# Altium PCB PIN_Gamma_PCB_MAR20.PcbDoc
Units mil, origin at the board's own origin, x right, y up, seen from the top; angles counter-clockwise.
Board outline 2345 x 2350 mil, 4 copper layers (Top, GND, Power, Bottom), stack 30.635 mil thick; 70 components, 44 nets, 201 pads, 0 vias.
Unrouted connection lines stored in the file: 88.
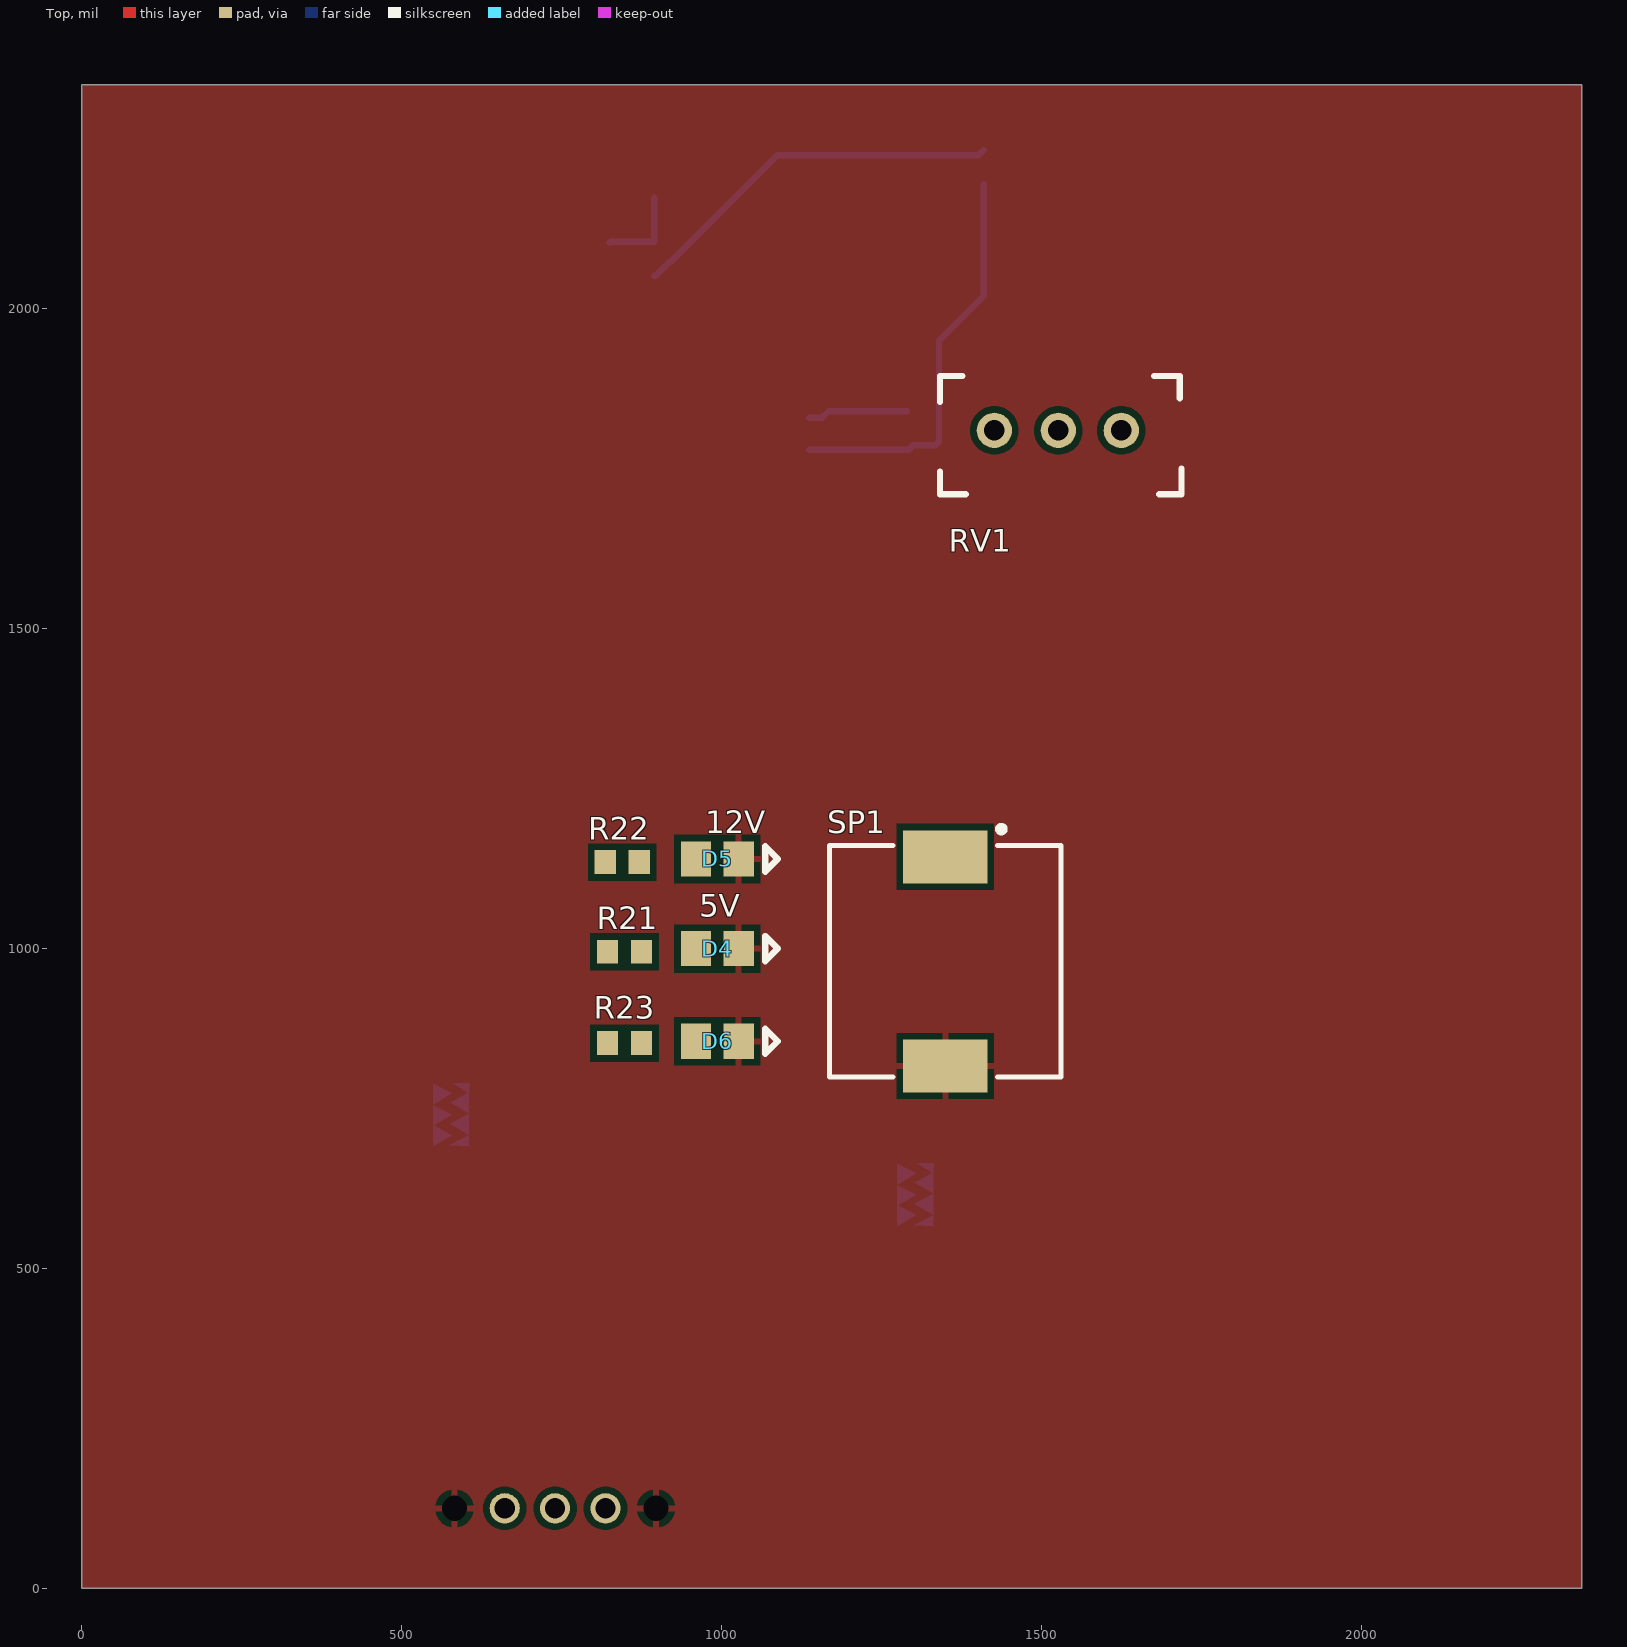
[diagram p0: Top view]
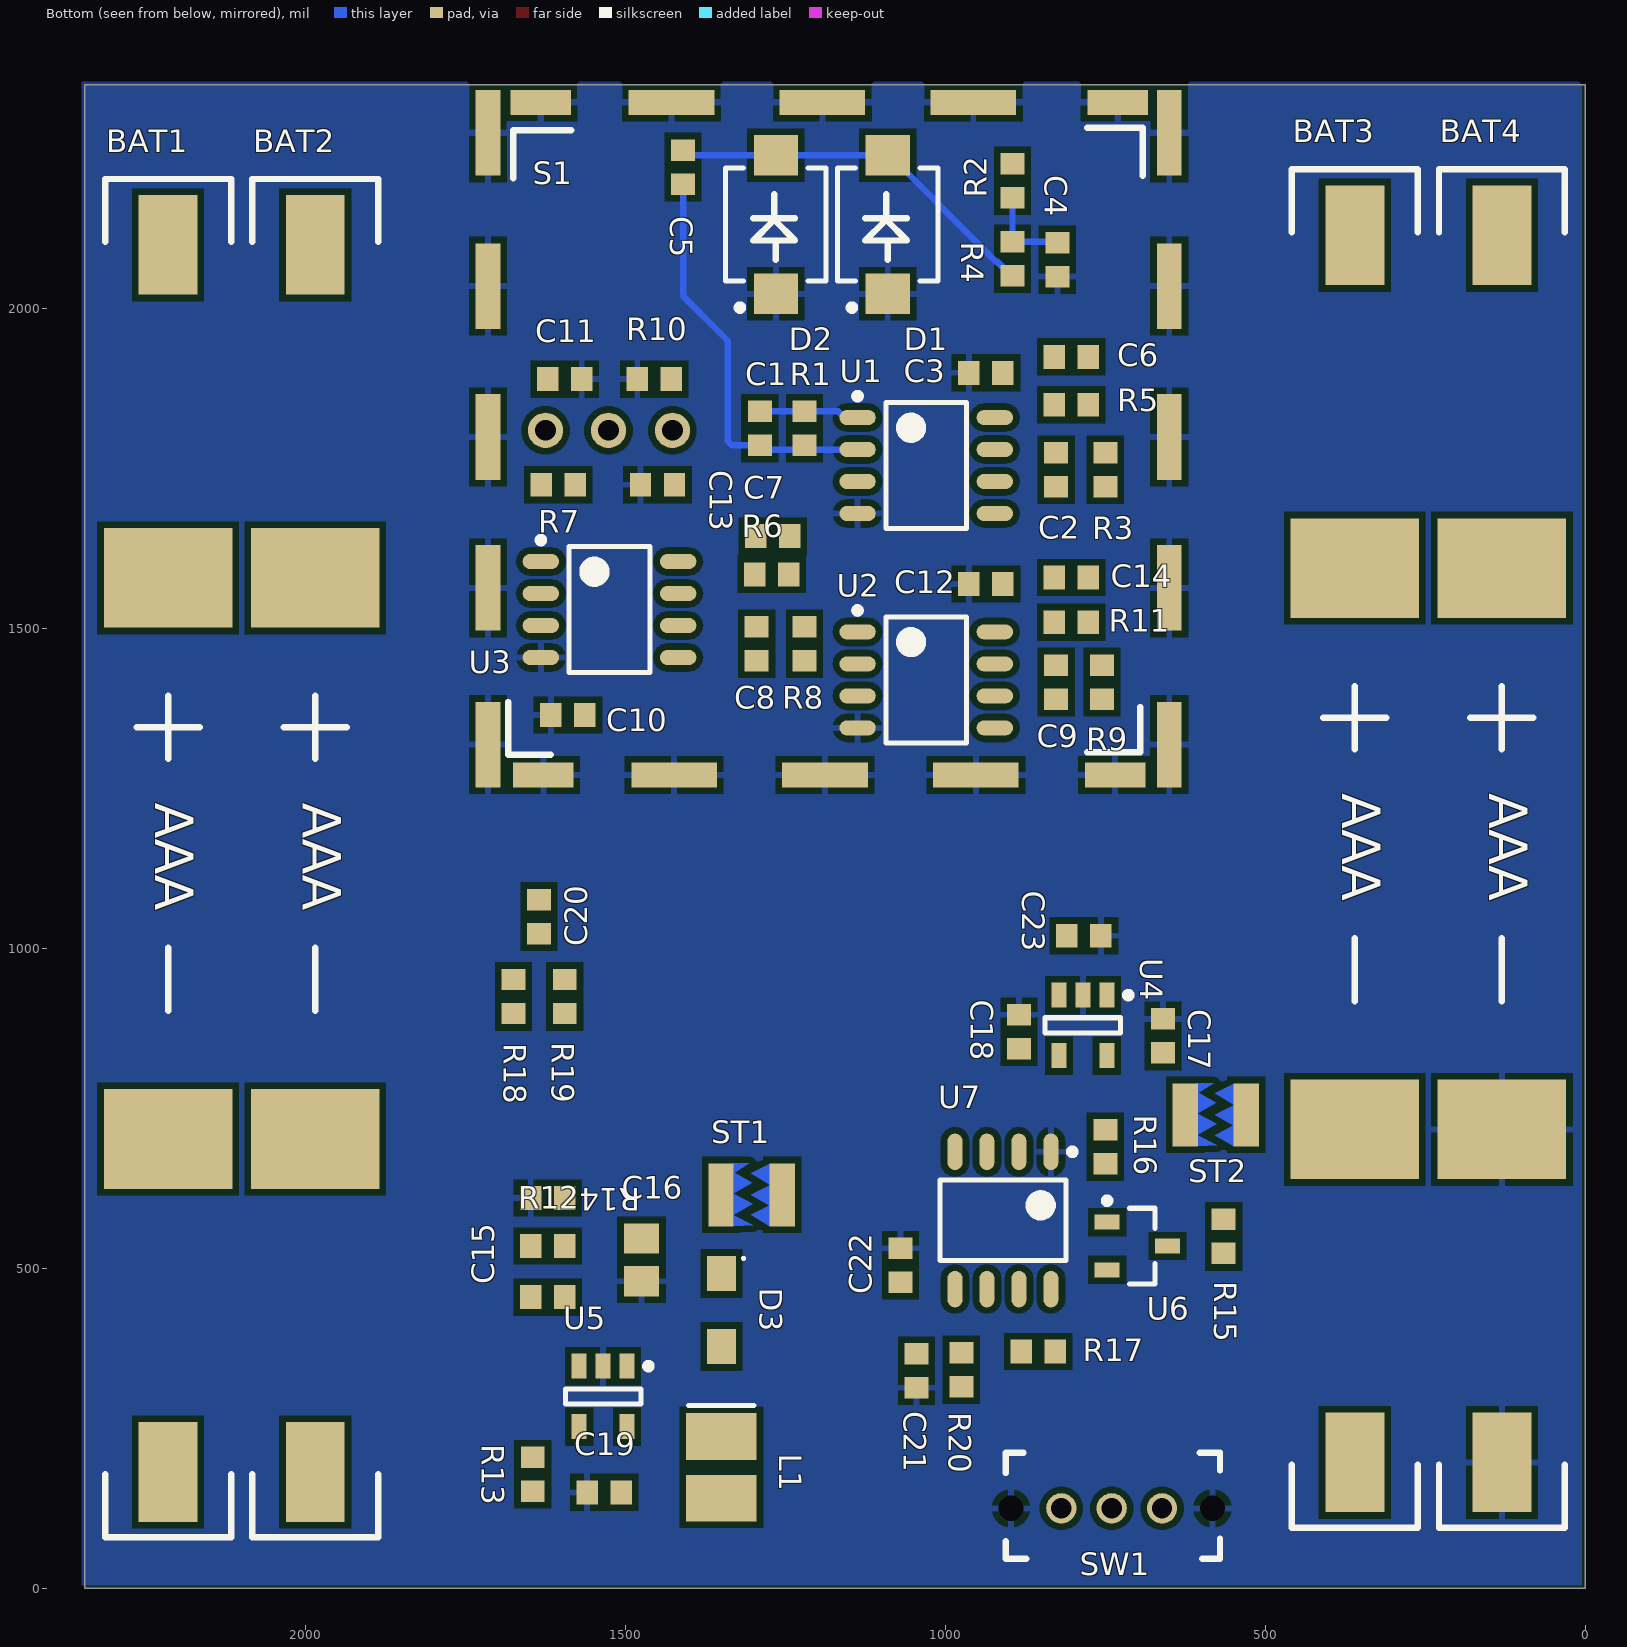
[diagram p1: Bottom view, seen from below]
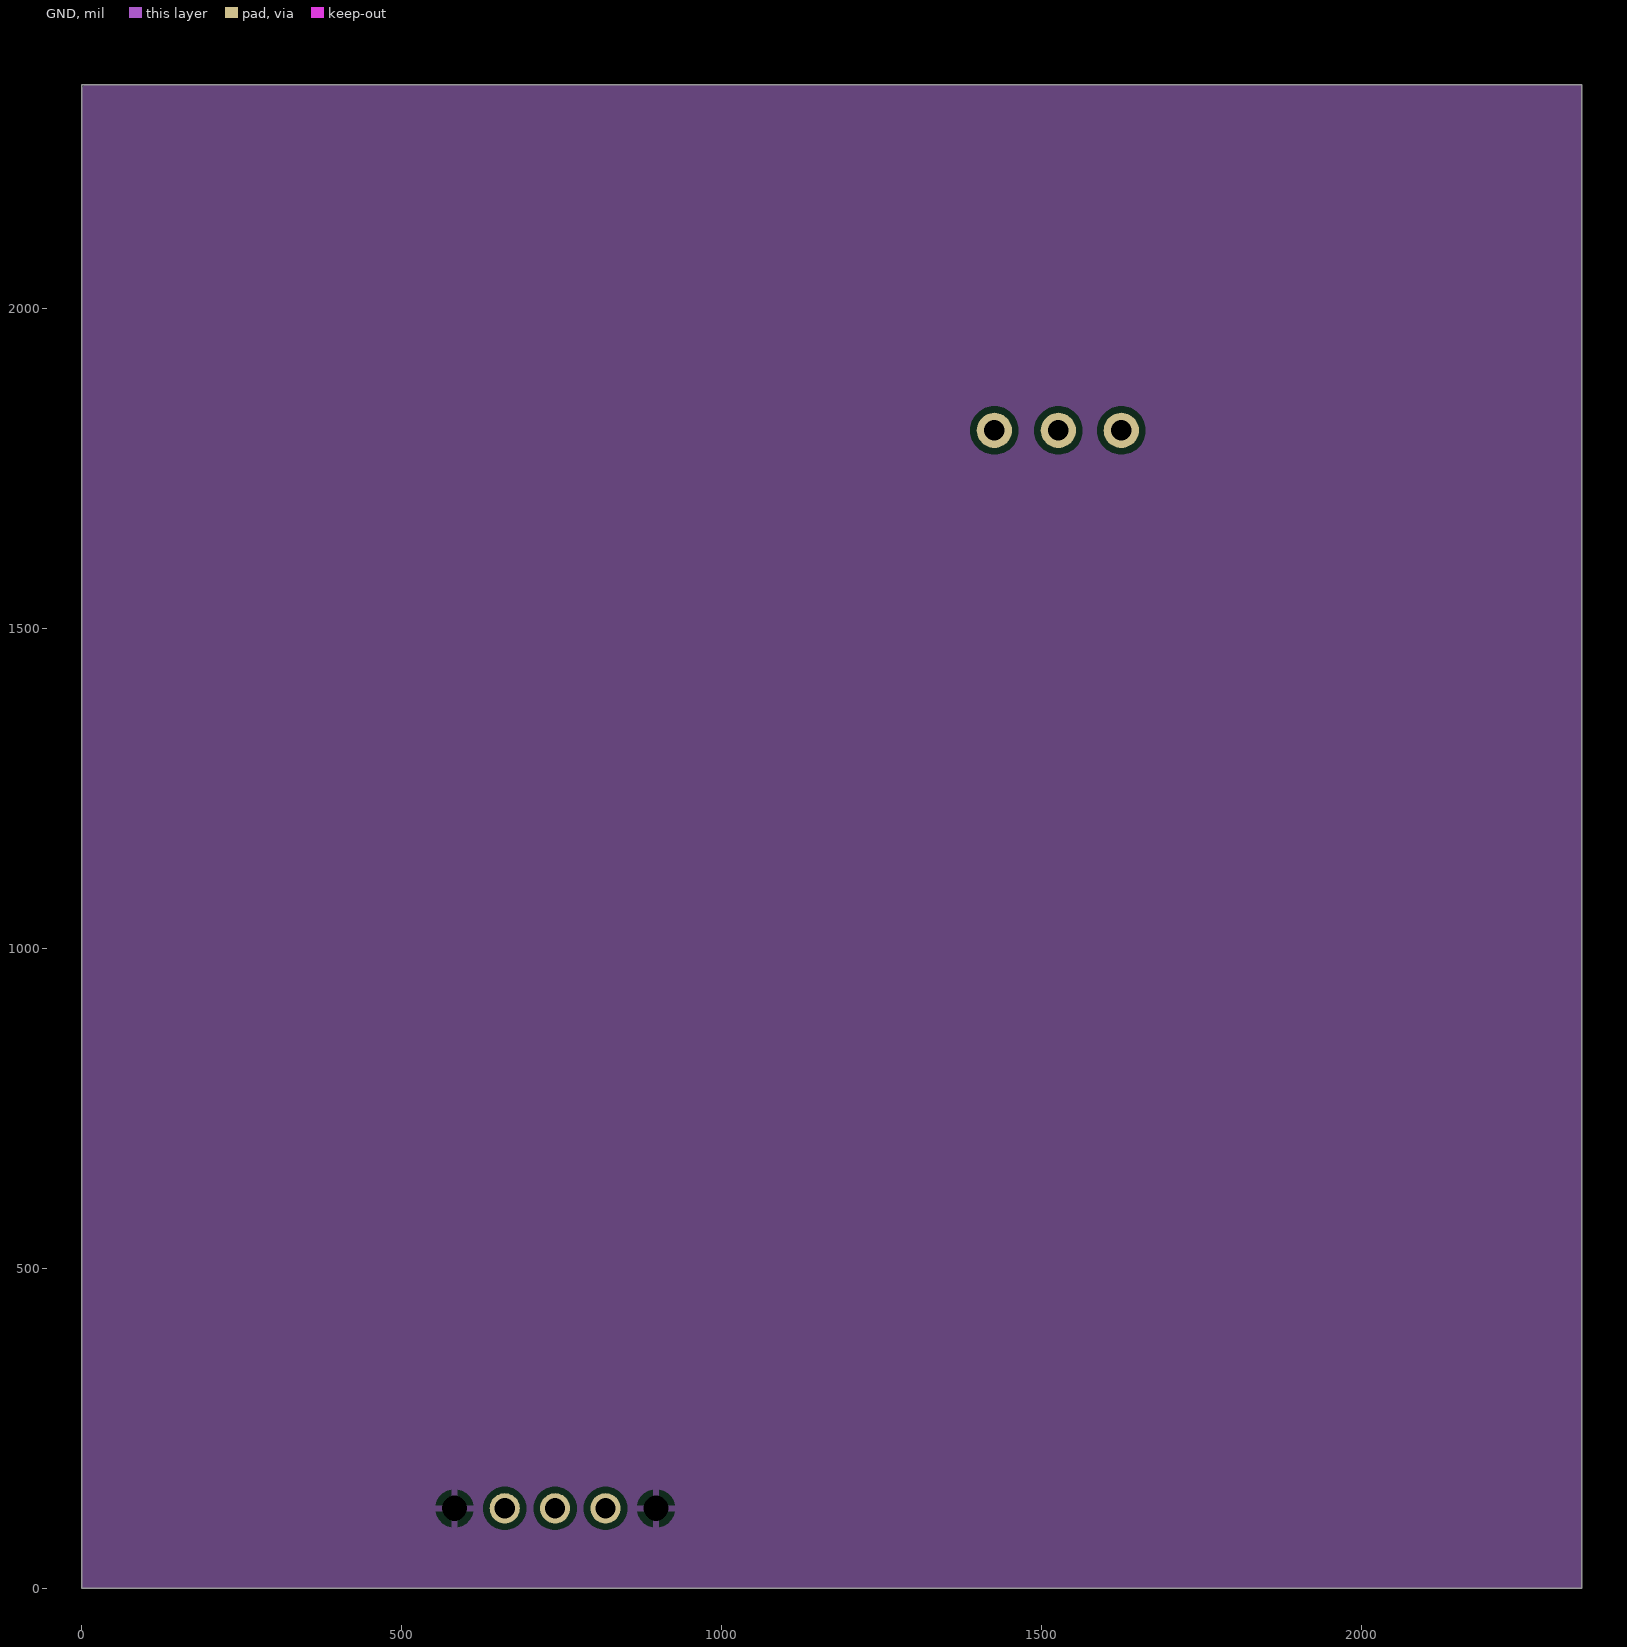
[diagram p2: GND]
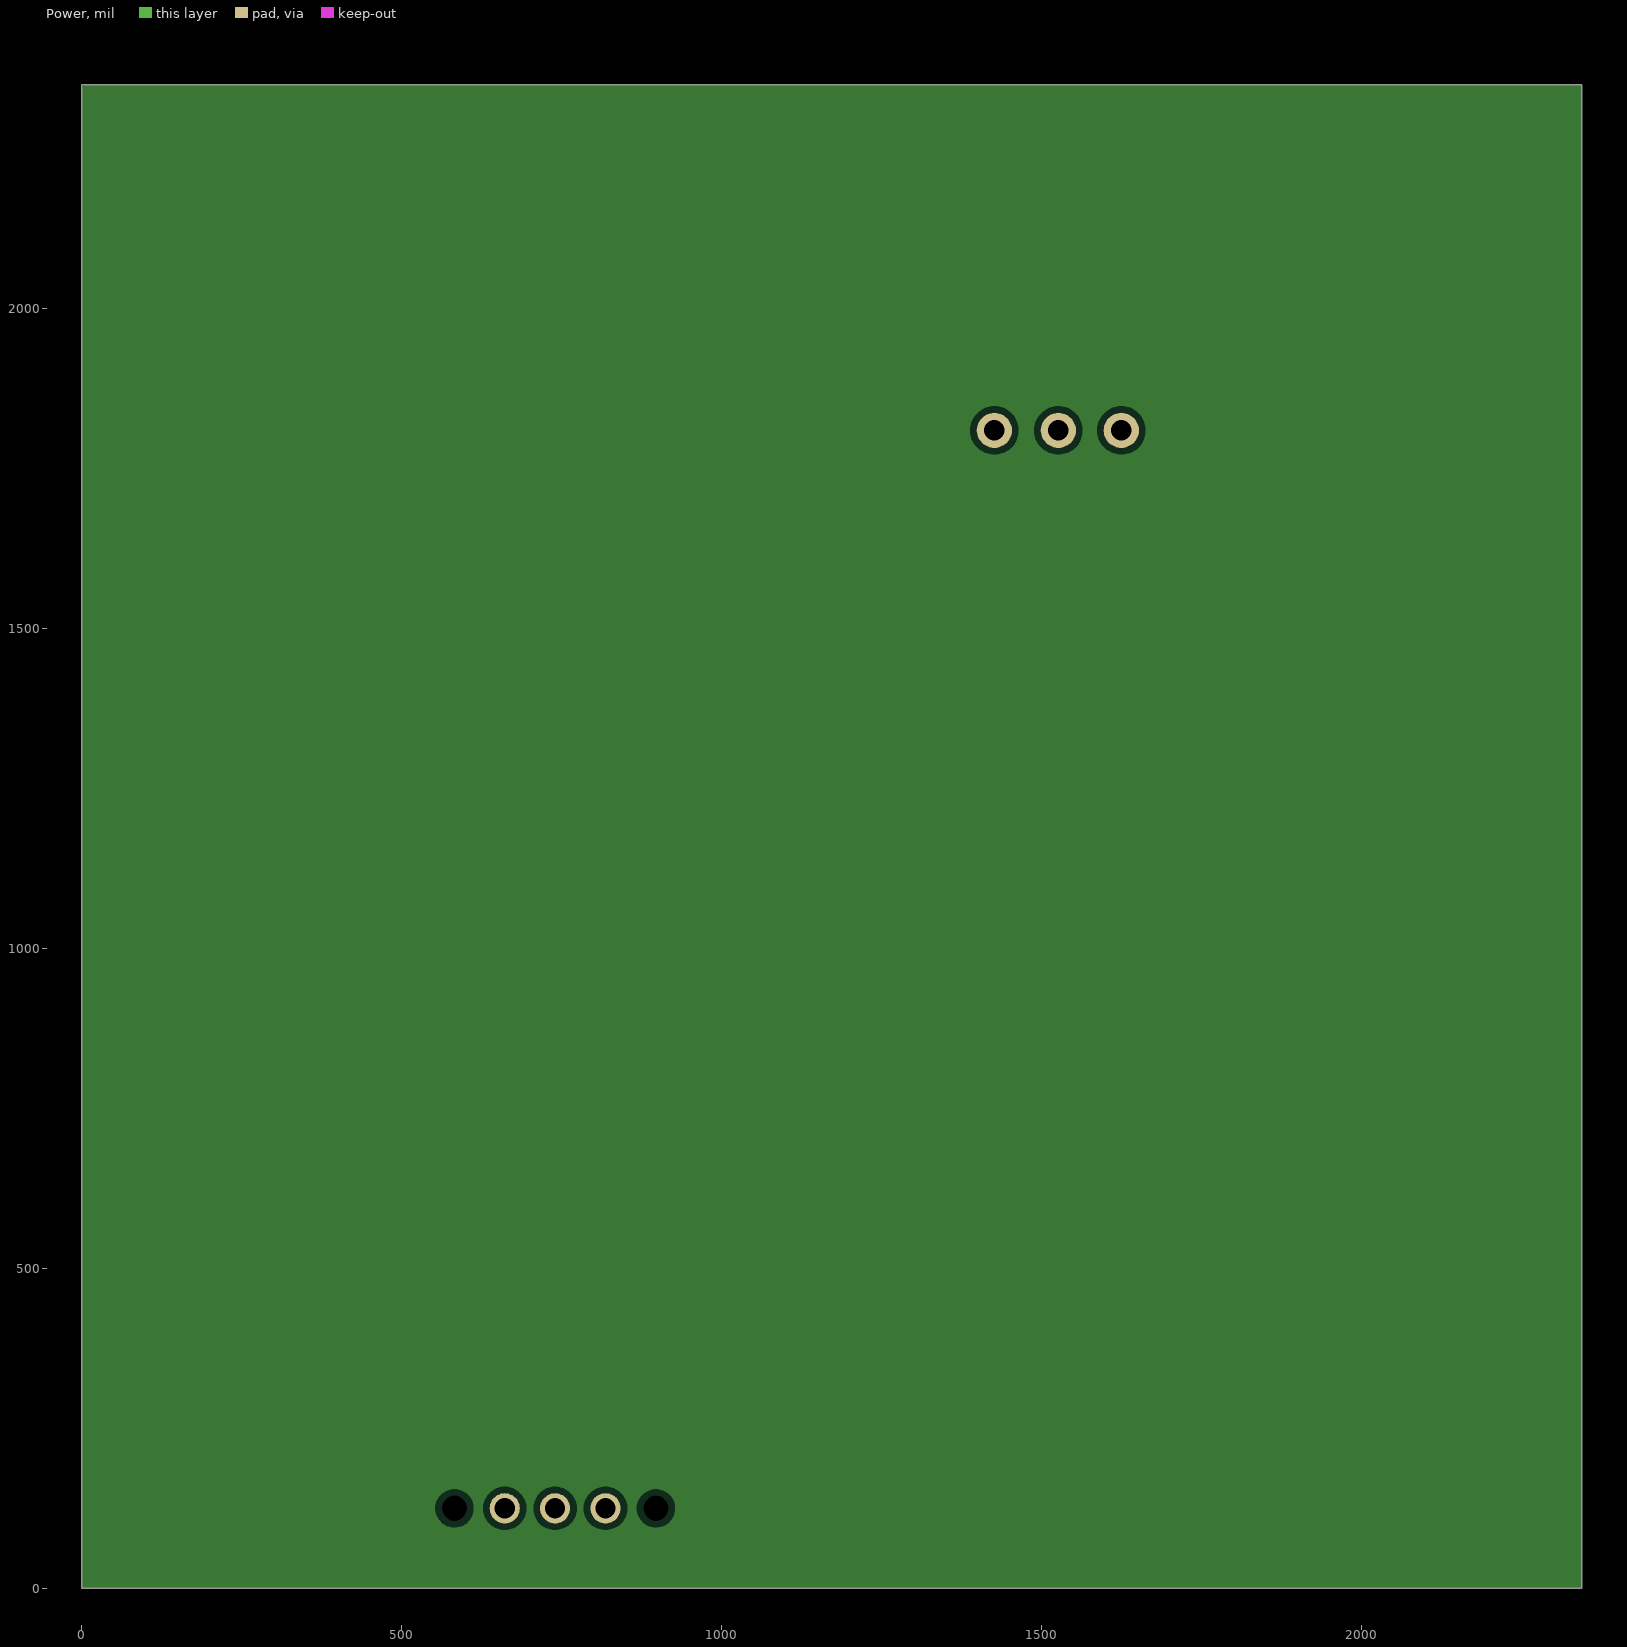
[diagram p3: Power]

## Layer stack, top to bottom
Top Solder: solder mask 0.4, Solder Resist, Dk 3.5
Top: signal copper 1.4
Dielectric 1: core 10, FR-4, Dk 4.2
GND: signal copper 1.4173
Dielectric 3: prepreg 5, Dk 4.2
Power: signal copper 1.4173
Dielectric 2: core 10, Dk 4.2
Bottom: signal copper 1.4
Bottom Solder: solder mask 0.4, Solder Resist, Dk 3.5

## Board outline
0,0 2345,0 2345,2350 0,2350

## Design rules (kind name [scope] priority, off if disabled: settings)
Clearance [All] p1: gap=10 ignorepadtopadclearanceinfootprint=FALSE
PolygonConnect [All] p1: connectstyle=Relief reliefconductorwidth=10 reliefentries=4 polygonreliefangle="90 Angle" airgapwidth=10
RoutingVias [All] p1: holewidth=28 width=50 viastyle="Through Hole" minholewidth=28 minwidth=50 maxholewidth=28 maxwidth=50
SolderMaskExpansion [All] p1: expansion=4 istentingtop=FALSE
Width [All] p1: maxlimit=10 minlimit=10 preferedwidth=10
30 further rules are at their usual default settings.

## Classes and differential pairs
component class PIN_Gamma: C1 C2 C3 C4 C5 C6 C7 C8 C9 C10 C11 C12 C13 C14 D1 D2 R1 R2 R3 R4 R5 R6 R7 R8 R9 R10 R11 RV1 U1 U2 U3
component class PIN_Gamma_Power: BAT1 BAT2 BAT3 BAT4 C15 C16 C17 C18 C19 C20 C21 C22 C23 D3 D4 D5 D6 L1 R12 R13 R14 R15 R16 R17 R18 R19 R20 R21 R22 R23 S1 SP1 ST1 ST2 SW1 U4 U5 U6 U7

## Components (designator, comment, footprint, x,y, rotation, side; value= is the part's Value field where it differs from the comment)
BAT1 "BAT/AAA_Clips/SMT" AAA_BATTERY_SMT 2313.43,56.3 r180 bottom (schematic designator BAT*1)
BAT2 "BAT/AAA_Clips/SMT" AAA_BATTERY_SMT 2083.43,56.3 r180 bottom (schematic designator BAT*2)
BAT3 "BAT/AAA_Clips/SMT" AAA_BATTERY_SMT 458.43,71.3 r180 bottom (schematic designator BAT*3)
BAT4 "BAT/AAA_Clips/SMT" AAA_BATTERY_SMT 228.43,71.3 r180 bottom (schematic designator BAT*4)
C1 "C/4P7/0603" C/0603 1290,1813.43 r90 bottom
C2 "C/4P7/0603" C/0603 826.83,1748.43 r90 bottom
C3 "C/0.1U/0603" C/0603 936.57,1900 r0 bottom
C4 "C/0.1U/0603" C/0603 825,2076.85 r270 bottom
C5 "C/0.01U/0603" C/0603 1410,2221.57 r270 bottom
C6 "C/1000P/0603" C/0603 803.2,1925 r0 bottom
C7 "C/0.01U/0603" C/0603 1270,1645 r180 bottom
C8 "C/4P7/0603" C/0603 1295,1476.57 r90 bottom
C9 "C/4P7/0603" C/0603 826.83,1416.57 r90 bottom
C10 "C/0.1U/0603" C/0603 1590,1365 r0 bottom
C11 "C/0.1U/0603" C/0603 1595,1890 r180 bottom
C12 "C/0.1U/0603" C/0603 936.57,1570 r0 bottom
C13 "C/0.1U/0603" C/0603 1450,1725 r0 bottom
C14 "C/0.01U/0603" C/0603 803.2,1580 r0 bottom
C15 "C/330P/0805" C/0603 1621.57,455 r0 bottom
C16 "C/4U7/0805" R/0805 1475,513.46 r270 bottom locked
C17 "C/1U/0603" C/0603 660,863.43 r90 bottom
C18 "C/1U/0603" C/0603 885,870 r90 bottom
C19 "C/2U2/0603" C/0603 1533.43,150 r0 bottom
C20 "C/100P/0603" C/0603 1635,1050 r90 bottom
C21 "C/0.012U/0603" C/0603 1045,340 r270 bottom
C22 "C/0.1U/0603" C/0603 1070,505 r90 bottom
C23 "C/0.1U/0603" C/0603 783.43,1020 r180 bottom
D1 "D/VBPW34S" VBPW34S 1090,2131.73 r90 bottom locked
D2 "D/VBPW34S" VBPW34S 1265,2131.73 r90 bottom
D3 "D/MBR1020VL" SOD-123F 1350,435 r270 bottom
D4 "D/LEDG/0805" D/0805 993.46,1000 r180 top locked
D5 "D/LEDG/0805" D/0805 993.46,1140 r180 top locked
D6 "D/LEDR/0805" D/0805 993.46,855 r180 top locked
L1 "L/10uH/SMD" INDP3030X15N 1350,189.09 r270 bottom
R1 "R/10M/0603" R/0603 1220,1813.43 r90 bottom
R2 "R/1M/0603" R/0603 895,2200 r270 bottom
R3 "R/10K/0603" R/0603 750,1748.43 r90 bottom
R4 "R/10M/0603" R/0603 895,2078.43 r270 bottom
R5 "R/1K/0603" R/0603 803.2,1850 r180 bottom
R6 "R/1K/0603" R/0603 1271.57,1585 r0 bottom
R7 "R/100K/0603" R/0603 1605,1725 r0 bottom
R8 "R/10K/0603" R/0603 1220,1476.57 r90 bottom
R9 "R/10K/0603" R/0603 755,1416.57 r90 bottom
R10 "R/150K/0603" R/0603 1455,1890 r0 bottom
R11 "R/1K/0603" R/0603 803.2,1510 r180 bottom
R12 "R/118K/0603" R/0603 1621.57,535 r180 bottom
R13 "R/976K/0603" R/0603 1645,178.43 r90 bottom
R14 "R/13K7/0603" R/0603 1621.57,610 r0 bottom
R15 "R/0r/0603" R/0603 565,550 r270 bottom
R16 "R/1K/0603" R/0603 750,690 r270 bottom
R17 "R/10K/0603" R/0603 855,370 r0 bottom
R18 "R/0r/0603" R/0603 1675,925 r90 bottom
R19 "R/0r/0603" R/0603 1595,925 r90 bottom
R20 "R/10K/0603" R/0603 975,341.57 r90 bottom
R21 "R/1K/0603" R/0603 848.43,995 r0 top
R22 "R/287r/0603" R/0603 845,1135 r0 top
R23 "R/287r/0603" R/0603 848.43,852.13 r0 top
RV1 "RV/10K/25Turn" 10K/25TN 1625,1810 r180 top
S1 "RF Shield" "RF SHIELD" 1734.69,2342.13 r180 bottom locked
SP1 "SP/Piezo" "AUDIO PIEZO" 1350,980 r270 top
ST1 "Shark Tooth" SharkTooth 1364.25,563.82 r180 bottom
ST2 "Shark Tooth" SharkTooth 638.78,688.82 r180 bottom
SW1 "SW/SPDT/THT" SW/SPDT/THT 740,125 r0 bottom
U1 "U/MAX4477ASA+-ND" SO8 1030,1755 r180 bottom
U2 "U/MAX4477ASA+-ND" SO8 1030,1420 r180 bottom
U3 "U/MAX987ESA+-ND" SO8 1525,1530 r180 bottom
U4 "U/AP1150ADS50" SOT23-5 785,880 r270 bottom
U5 "LMR62014" SOT23-5 1535,300 r270 bottom
U6 "U/2N3904/SOT23" SOT23-3 700,535 r180 bottom
U7 "U/LM555CMX" SO8 910,575 r270 bottom

## Footprints (in the part's own frame and the unit in brackets; to place one, negate y for a bottom-side part, rotate by r counter-clockwise, add the part's x,y. Pads: shape width x height; smd on the part's side, far side on the other; paste and mask are expansions set on the pad)
10K/25TN [mm]
  round 1.4 hole 0.82: 1(0,0) 2(2.5,0) 3(5.04,0)
  silkscreen extent -2.39,-2.16 7.2,2.54
AAA_BATTERY_SMT [mm] "AAA Battery Holder"
  rect 2.34x3.96 smd: 1(2.5,51.91) 4(2.5,3.19)
  rect 5.1x3.96 smd: 2(2.5,38.69) 3(2.5,16.41)
  silkscreen extent 0,0.6 5,54.52
"AUDIO PIEZO" [mm] "Piezo Speaker 2-Leads, Body 9.00x9.00mm, IPC Medium Density, Digikey 490-9647-1-ND"
  rect 2.1x3.35 smd: 1(-4.15,0) 2(4.15,0)
  silkscreen extent -5.37,-4.6 4.6,4.6, body extent -4.6,-4.5 4.6,4.5, height 2
C/0603 [mm] "Chip Capacitor, 2-Leads, Body 1.60x0.80mm, IPC Medium Density"
  rect 0.85x0.95 smd: 1(-0.675,0) 2(0.675,0)
  body extent -0.85,-0.45 0.85,0.45, height 0.9
D/0805 [mm] "LED, 2-Leads, Body 2.00x1.25mm, IPC Medium Density"
  rect 1.2x1.4 smd: 1(-0.85,0) 2(0.85,0)
  silkscreen extent -2.4,-0.5 -1.9,0.5, body extent -1.05,-0.67 1.05,0.67, height 1.35
INDP3030X15N [mm] "Precision Wire Wound Inductor, 2-Leads, Body 3.00x3.00mm, IPC Medium Density"
  rect 1.85x2.8 smd: 1(-1.225,0) 2(1.225,0)
  silkscreen extent -2.45,-1.3 -2.45,1.3, body extent -1.6,-1.5 1.6,1.5, height 1.6
R/0603 [mm] "Chip Resistor, 2-Leads, Body 1.60x0.80mm, IPC Medium Density"
  rect 0.85x0.95 smd: 1(-0.675,0) 2(0.675,0)
  body extent -0.85,-0.45 0.85,0.45, height 0.9
R/0805 [mm] "Chip Resistor 2-Leads, Body 2.00x1.25mm, IPC Medium Density"
  rect 1.2x1.4 smd: 1(-0.85,0) 2(0.85,0)
  body extent -1.05,-0.67 1.05,0.67, height 1.35
"RF SHIELD" [mm] "1.034X1.034X0.2-NON-VENTED"
  rect 0.99x3.4 smd: 1(0.5,-1.705) 2(0.5,-7.79) 3(0.5,-13.78) 4(0.5,-19.77) 5(0.5,-25.995) 11(27.55,-25.995) 12(27.55,-19.77) 13(27.55,-13.78) 14(27.55,-7.79) 15(27.55,-1.705)
  rect 2.4x0.99 smd: 6(2.7,-27.2) 10(25.4,-27.2) 16(25.5,-0.5) 20(2.6,-0.5)
  rect 3.4x0.99 smd: 7(7.89,-27.2) 8(13.88,-27.2) 9(19.87,-27.2) 17(19.77,-0.5) 18(13.78,-0.5) 19(7.79,-0.5)
  silkscreen extent 1.3,-26.4 26.5,-1.5, body extent -0.13,-27.85 28.2,0.08, height 5.6
SharkTooth [mm] "Sharks Tooth"
  rect 1x2.5 smd: 1(0.35,1.3) 2(2.775,1.3)
  Top region: 1.575,1.775 0.85,2.191 0.85,1.359
  Top region: 1.475,2.55 0.825,2.55 0.85,2.159
  Top region: 1.6,0.95 0.85,1.341 0.85,0.509
  Top region: 1.625,0.1 0.85,0.491 0.85,0.05
  Top region: 1.525,0.5 2.275,0.05 2.275,0.891
  Top region: 1.525,1.3 2.275,0.859 2.275,1.691
  Top region: 1.525,2.15 2.275,1.709 2.275,2.541
  body extent -0.05,-0.05 3.2,2.65, height 0.1
SO8 [mm] "SOIC, 8-Leads, Body 4.90x3.90mm, Pitch 1.27mm, IPC Medium Density"
  oval 1.45x0.6 smd: 1(-2.725,1.905) 2(-2.725,0.635) 3(-2.725,-0.635) 4(-2.725,-1.905) 5(2.725,-1.905) 6(2.725,-0.635) 7(2.725,0.635) 8(2.725,1.905)
  silkscreen extent -2.85,-2.5 1.6,2.88, body extent -3,-2.5 3,2.5, height 1.75
SOD-123F [mm] "SODFL, 2-Leads, Body 1.72x3.60mm, IPC Medium Density"
  rect 1.4x1.15 smd: 1(-1.45,0) 2(1.45,0)
  silkscreen extent -2.1,0.82 -2,0.92, body extent -1.8,-0.97 1.8,0.97, height 1.08
SOT23-3 [mm] "SOT23, 3-Leads, Body 2.90x2.45mm, Pitch 0.95mm, IPC Medium Density"
  rect 1x0.6 smd: 1(-1.2,0.95) 2(-1.2,-0.95) 3(1.2,0)
  silkscreen extent -1.33,-1.5 0.7,1.92, body extent -1.3,-1.5 1.3,1.5, height 1.1
SOT23-5 [mm] "SOT23, 5-Leads, Body 2.90x2.45mm, Pitch 0.95mm, IPC Medium Density"
  rect 1x0.6 smd: 1(-1.2,0.95) 2(-1.2,0) 3(-1.2,-0.95) 4(1.2,-0.95) 5(1.2,0.95)
  silkscreen extent -1.32,-1.5 0.3,1.92, body extent -1.3,-1.5 1.3,1.5, height 1.1
SW/SPDT/THT [mm] "SWITCH SLIDE SPDT 200MA 30V"
  round 0 hole 1 unplated: 1(-4,0) 5(4,0)
  round 1.2 hole 0.8: 2(-2,0) 3(0,0) 4(2,0)
  silkscreen extent -4.3,-2.2 4.2,2
VBPW34S [mm] "SODFL, 2-Leads, Body 3.90x6.40mm, IPC Medium Density"
  rect 1.6x1.75 smd: A(-2.75,0) K(2.75,0)
  silkscreen extent -3.42,-2 2.25,2, body extent -3.2,-2 3.2,2, height 1.2

## Part data
BAT1 BAT2 BAT3 BAT4: "AAA 1.5V SMT Clips", Digikey Part=36-55-ND
C1 C2 C8 C9: "CAP CER 4.7PF 50V C0G/NPO 0603", Digikey=311-1740-1-ND
C3 C4 C10 C11 C12 C13 C22 C23: "CAP CER 0.1UF 50V X7R 0603", Digikey Part=399-7845-1-ND
C5 C7 C14: "CAP CER 0.01UF 50V X7R 0603", Digikey Part=399-1091-1-ND
C6: "CAP CER 1000PF 50V C0G/NP0 0603", Digikey=1276-1091-1-ND
C15: "CAP CER 330PF 50V C0G/NP0 0805", Digikey=1276-2645-1-ND
C16: "CAP CER 4.7UF 50V X5R 0805", Digikey=1276-1860-1-ND
C17 C18: "CAP CER 1UF 50V X5R 0603", Digikey=1276-1860-1-ND
C19: "2.2µF ±10% 10V Ceramic Capacitor X5R 0603 (1608 Metric)", Digikey=490-1545-1-ND
C20: "CAP CER 100PF 50V C0G/NP0 0603", Digikey=399-1061-1-ND
C21: "CAP CER 0.012UF 50V X7R 0603", Digikey Part=1276-1785-1-ND
D1 D2: "PHOTODIODE PIN HI SPEED HI SENS"
D3: "Diode Schottky 20V 1A Surface Mount SOD-123F", Digikey Part=MBR1020VLCT-ND
D4 D5: "LED GREEN CLEAR 2.1V 0805 SMD", Digikey Part=160-1423-1-ND
D6: "LED GREEN CLEAR 2V 0805 SMD", Digikey Part=160-1427-1-ND
L1: "10µH Semi-Shielded Wirewound Inductor 1A 276 mOhm Max Nonstandard", Digikey Part=SRN3015-100MCT-ND
R1 R4: "RES SMD 10M OHM 5% 1/10W 0603", Digikey Part=RMCF0603JT10M0CT-ND
R2: "RES SMD 1M OHM 0.1% 1/16W 0603", Digikey Part=A119955CT-ND
R3 R8 R9 R17 R20: "RES SMD 10K OHM 5% 1/10W 0603", Digikey Part=311-10KGRCT-ND
R5 R6 R11 R16 R21: "RES SMD 1K OHM 5% 1/10W 0603", Digikey Part=311-1.0KGRCT-ND
R7: "RES SMD 100K OHM 1% 1/10W 0603", Digikey Part=311-100KHRCT-ND
R10: "RES SMD 150K OHM 1% 1/10W 0603", Digikey Part=311-150KGRDKR-ND
R12: "RES SMD 118K OHM 1% 1/10W 0603", Digikey Part=311-118KHRCT-ND
R13: "RES SMD 976K OHM 1% 1/10W 0603", Digikey Part=311-976KHRCT-ND
R14: "RES SMD 13.7K OHM 1% 1/10W 0603", Digikey Part=311-13.7KHRCT-ND
R15 R18 R19: "RES SMD 0 OHM JUMPER 1/10W 0603", Digikey Part=311-0.0GRCT-ND
R22 R23: "RES SMD 287 OHM 1% 1/10W 0603", Digikey Part=311-287HRCT-ND
RV1: "TRIMMER 10K OHM 0.5W TH", Digikey Part=A105870-ND
S1: "SMS-403C & SMS-403F RF Shield Cover 1.058\" (26.87mm) X 1.058\" (26.87mm) Non-Vented Surface Mount", Digikey PartC=1798-1210-ND, Digikey PartF=1798-1211-1-ND
SP1: "AUDIO PIEZO TRANSDUCER Max 12.5V 4KHZ SMD", Digikey Part=490-9647-1-ND
ST1 ST2: "Sharks Tooth Small"
SW1: "SWITCH SLIDE SPDT 200MA 30V", Digikey Part=A107673-ND
U1 U2: "Dual Low-Noise, Low-Distortion, Wide-Band, Rail-to-Rail Op Amps"
U3: "Comparator General Purpose CMOS, Push-Pull, Rail-to-Rail, TTL 8-SO"
U4: "IC REG LINEAR 5V 200MA SOT23-5", Digikey Part=AP1150ADS50CT-ND
U5: library part U/LMR62014XMF/NOPBCT-ND, "Boost Switching Regulator IC Positive Adjustable 3V 1 Output 1.8A (Switch) SC-74A, SOT-753"
U6: "TRANS NPN 40V 0.2A SOT23", Digikey Part=MMBT3904LT3GOSCT-ND
U7: "555 Type, Timer/Oscillator (Single) IC 8-SOIC"

## Nets (pads, with @x,y where several pads share a name; then routed paths per layer and width w, separated by ;. In a path a pad name is that pad's centre, name@x,y a point inside that pad or via, vN(x,y) a via of type N, cw(c..) or ccw(c..) an arc to the next point about the centre after c; other vN are vias at no path point)
5V: C3.1 C10.1 C12.1 R7.1 R15.1 R22.1 ST2.2 U1.8 U2.8 U3.7
12V: C17.1 R2.1 R21.1 ST1.2 U4.1 U4.5
CompOut: R16.1 R18.1 R23.1 U3.6
GND: BAT4.3 BAT4.4 C3.2 C4.2 C10.2 C11.2 C12.2 C13.2 C16.2 C17.2 C18.2 C19.2 C21.2 C22.2 C23.2 D1.A D2.A D4.1 D5.1 D6.1 R10.2 R14.2 S1.1 S1.2 S1.3 S1.4 S1.5 S1.6 S1.7 S1.8 S1.9 S1.10 S1.11 S1.12 S1.13 S1.14 S1.15 S1.16 S1.17 S1.18 S1.19 S1.20 SP1.2 SW1.1 SW1.5 U1.4 U2.4 U3.4 U4.2 U5.2 U7.1
IN+: C11.1 R7.2 RV1.1 U1.3 U1.5 U2.3 U2.5
NetBAT1_1: BAT1.1 BAT1.2 SW1.4
NetBAT1_3: BAT1.3 BAT1.4 BAT2.1 BAT2.2
NetBAT2_3: BAT2.3 BAT2.4 BAT3.1 BAT3.2
NetBAT3_3: BAT3.3 BAT3.4 BAT4.1 BAT4.2
NetC1_1: C1.1 C5.2 R1.1 U1.2 | length 639.3
  Bottom w10: U1.2 1293.15,1780 1300,1786.85 1334.14,1786.85 1340,1792.71 1340,1950 1410,2020 C5.2
NetC1_2: C1.2 C6.1 R1.2 U1.1 | length 156.9
  Bottom w10: U1.1 1157.7,1830 1167.7,1840 R1.2 C1.2
NetC2_1: C2.1 R3.1 R5.2 U1.6
NetC2_2: C2.2 C7.1 R3.2 U1.7
NetC4_1: C4.1 R2.2 R4.1 | length 139.1
  Bottom w10: C4.1 826.57,2105 R4.1 R2.2
NetC5_1: C5.1 D1.K D2.K R4.2 | length 596.3
  Bottom w10: R4.2 896.97,2051.85 918.39,2073.27 920.32,2073.27 1087.05,2240 D1.K D2.K 1401.85,2240 C5.1
NetC6_2: C6.2 R5.1
NetC7_2: C7.2 R6.1
NetC8_2: C8.2 C14.1 R8.2 U2.1
NetC9_1: C9.1 R9.1 R11.2 U2.6
NetC9_2: C9.2 R9.2 U2.7 U3.2
NetC13_1: C13.1 R10.1 RV1.3
NetC14_2: C14.2 R11.1
NetC15_1: C15.1 R12.2 R14.1 U5.3
NetC15_2: C15.2 C16.1 D3.1 R12.1 ST1.1
NetC18_1: C18.1 ST2.1 U4.4
NetC20_1: C20.1 R18.2 R19.2
NetC20_2: C20.2 SP1.1
NetC21_1: C21.1 R20.2 U7.2 U7.6
NetC22_1: C22.1 U7.5
NetC23_1: C23.1 U4.3
NetD3_2: D3.2 L1.1 U5.1
NetD4_2: D4.2 R21.2
NetD5_2: D5.2 R22.2
NetD6_2: D6.2 R23.2
NetR13_2: R13.2 U5.4
NetR15_2: R15.2 U6.3
NetR16_2: R16.2 U6.1
NetR17_1: R17.1 U6.2 U7.4 U7.8
NetR17_2: R17.2 R20.1 U7.7
NetR19_1: R19.1 U7.3
NetRV1_2: RV1.2 U3.3
NetSW1_2: SW1.2
OUTB: C8.1 R6.2 R8.1 U2.2
V_Bat: C19.1 L1.2 R13.1 SW1.3 U5.5
pads on no net: U3.1 U3.5 U3.8

## Polygon pours and split planes (outlines as drawn)
GND on Top "GND_L01_P000" (solid, pour order 0): 0,2345 5,2350 2345,2350 2345,0 0,0
GND on GND "GND_L02_P001" (solid, pour order 1): 0,2345 5,2350 2345,2350 2345,0 0,0
5V on Power "5V_L03_P002" (solid, pour order 2): 0,2345 5,2350 2345,2350 2345,0 0,0
GND on Bottom "GND_L04_P003" (solid, pour order 3): 5,2350 10,2355 2350,2355 2350,5 5,5

## Silkscreen, mask and mechanical layers (free items; w line width, h text height)
Top Overlay:
  text "12V" at 975,1180 h35.43
  text "5V" at 965,1050 h35.43
Mechanical 1:
  the board outline again, w10

## Text inside footprints (layer, text, board x,y; h text height)
BAT1: Bottom Overlay "AAA" at 2234.68,1227.56 h60 r90
BAT2: Bottom Overlay "AAA" at 2004.68,1227.56 h60 r90
BAT3: Bottom Overlay "AAA" at 379.68,1242.56 h60 r90
BAT4: Bottom Overlay "AAA" at 149.68,1242.56 h60 r90